# EAGLE board 8ChannelRebelSSR_v5 (EAGLE 9.6.2)
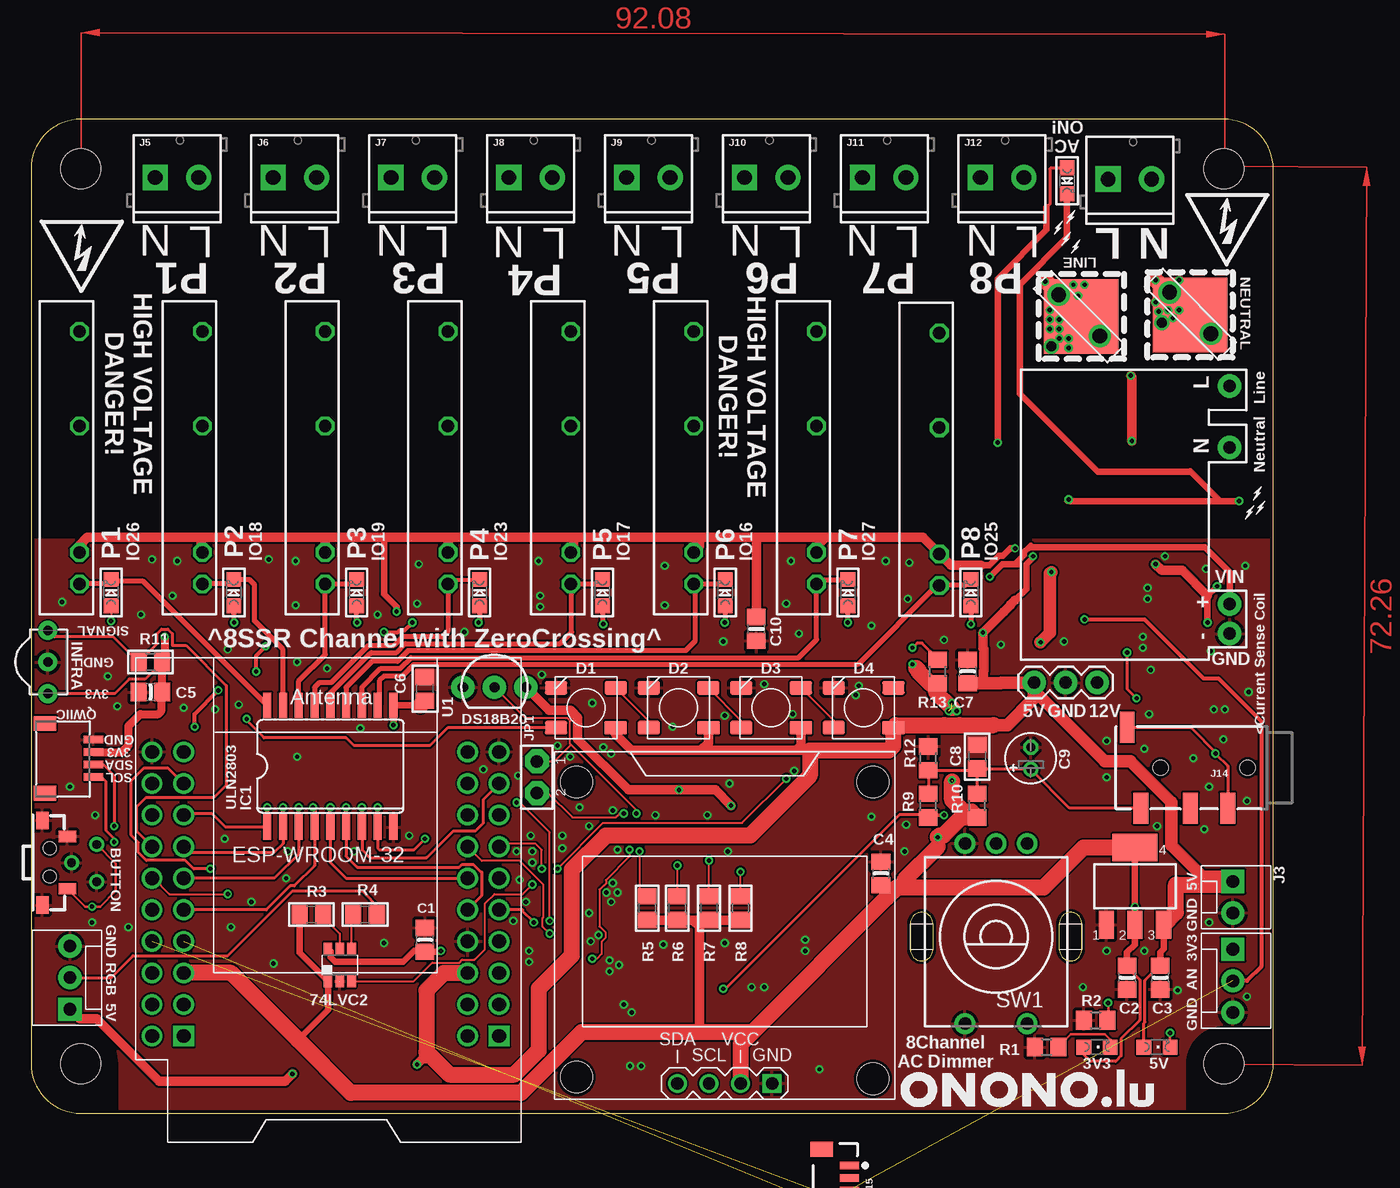
[diagram p0: board, top side]
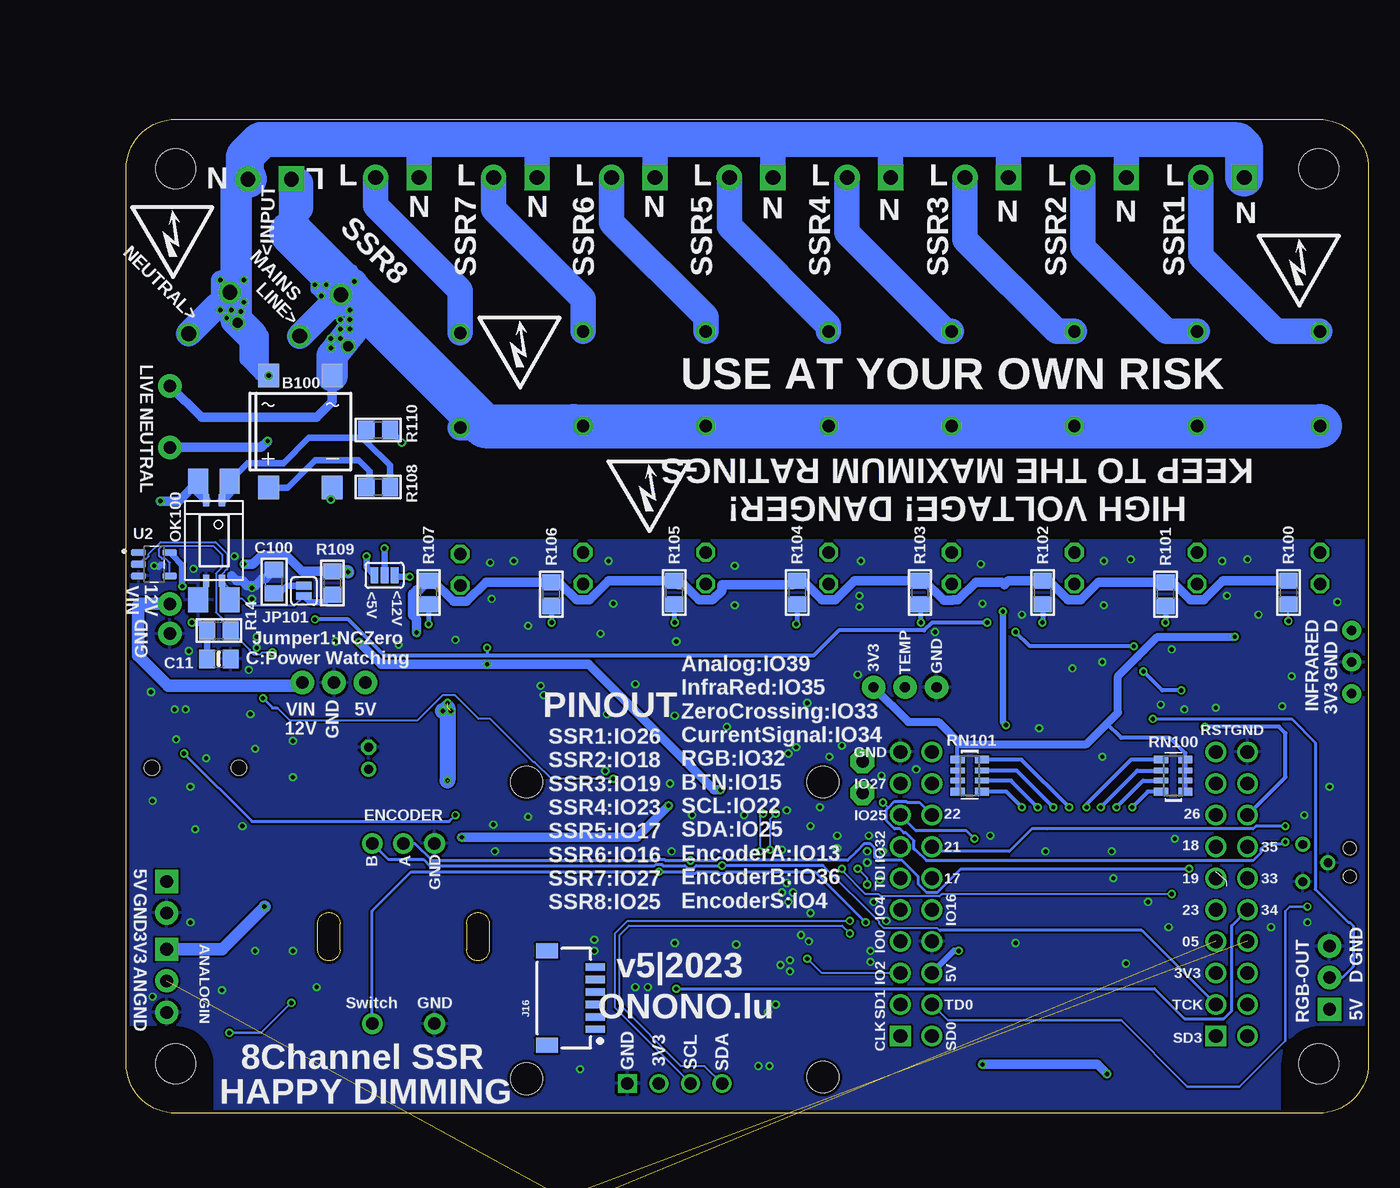
[diagram p1: board, bottom side, seen from below]

Size 100 x 80 mm. Coordinates in mm from the lower left corner, seen from the top.
Copper layers (1*16): Top 0.035mm / dielectric 1.5mm / Bottom 0.035mm
Design rules "dirt_cheap_dirty_boards.v1.1": minimum track width 6mil, minimum drill 12mil, track to track 6mil, track to pad 6mil, pad to pad 6mil, via to via 6mil, smd to smd 0mil, copper to edge 10mil, drill to drill 10mil, minimum pad ring 10mil, minimum via ring 6mil, stop-mask expansion 2mil, vias tented up to drill 25mil, thermal gap 10mil
Net classes: 3 12_mil: width 0.305 mm

## Footprints (pad centres in the part's own frame; a part is rotated, then mirrored left to right if it is on the bottom)
CHIPLED_0805 = smd 1.2 x 1.2: A 0,-1.05; C 0,1.05
DBV-R-PDSO-G6 = smd 0.69 x 0.99: 1 -0.95,-1.29; 2 0,-1.29; 3 0.95,-1.29; 4 0.95,1.3; 5 0,1.3; 6 -0.95,1.3
DBS = smd 1.7 x 1.9: + -2.55,-4.5; - 2.55,-4.5; AC1 -2.55,4.5; AC2 2.55,4.5
0805-NO = smd 1.3 x 1.5: 1 -0.95,0; 2 0.95,0
0805_NOTHERMALS@1 = smd 1.3 x 1.5: 1 -0.95,0; 2 0.95,0
E1,8-4 = drill 0.711 pad 1.168: + -0.889,0 | drill 0.711 pad 1.168 octagon: - 0.889,0
JST_SH4 = smd 0.6 x 1.55: 1 -1.5,2.514; 2 -0.5,2.514; 3 0.5,2.514; 4 1.5,2.514 | smd 1.2 x 1.8: MT1 -2.8,-1.386; MT2 2.8,-1.386
WS2812B = smd 1.8 x 1.1: 1 -2.4,1.6; 2 -2.4,-1.6; 3 2.4,-1.6; 4 2.4,1.6
SO-18L = smd 0.66 x 2.032: 1 -4.445,-4.902; 2 -3.175,-4.902; 3 -1.905,-4.902; 4 -0.635,-4.902; 5 0.635,-4.902; 6 1.905,-4.902; 7 3.175,-4.902; 8 4.445,-4.902; 9 5.715,-4.902; 10 5.715,4.902; 11 4.445,4.902; 12 3.175,4.902; 13 1.905,4.902; 14 0.635,4.902; 15 -0.635,4.902; 16 -1.905,4.902; 17 -3.175,4.902; 18 -4.445,4.902
TSOP382 = drill 0.762 pad 1.524: 1 -2.54,0; 2 0,0; 3 2.54,0
MOLEX-1X3 = drill 1.016 pad 1.88 square: 1 0,0 | drill 1.016 pad 1.88: 2 2.54,0; 3 5.08,0
MOLEX-1X2 = drill 1.016 pad 1.88 square: 1 0,0 | drill 1.016 pad 1.88: 2 2.54,0
1X03 = drill 1.016 pad 1.88: 1 0,0; 2 2.54,0; 3 5.08,0
SCREWTERMINAL-3.5MM-2 = drill 1.2 pad 2.032 square: 1 0,0 | drill 1.2 pad 2.032: 2 3.5,0
AUDIO_JACK_3.5MM_TRRS_SMD_RA = smd 1.2 x 2.5: EARTH 11.3,-3.25; RING1 6.2,3.25; RING2 3.2,3.25; TIP 10.2,3.25 | hole 1.2: 1.6,0; 8.6,0
JST-6-SMD-VERT-1.0MM = smd 0.6 x 1.55: 1 -2.54,1.27; 2 -1.54,1.27; 3 -0.54,1.27; 4 0.46,1.27; 5 1.46,1.27; 6 2.46,1.27 | smd 1.2 x 1.8: P$1 -3.84,-0.955; P$2 3.76,-0.955
JST-6-SMD-HORI-1.0MM = smd 0.6 x 1.55: 1 -2.5,-4.775; 2 -1.5,-4.775; 3 -0.5,-4.775; 4 0.5,-4.775; 5 1.5,-4.775; 6 2.5,-4.775 | smd 1.2 x 1.8: M1 -3.8,-0.9; M2 3.8,-0.9
JUMPER2 = drill 1 pad 1.93 octagon: 1 2.54,0; 2 0,0
SMT-JUMPER_3_2-NC_PASTE_SILK = smd 0.635 x 1.27: 1 -0.813,0; 2 0,0; 3 0.813,0
SMT-JUMPER_2_NO_SILK = smd 0.635 x 1.27: 1 -0.406,0; 2 0.406,0
AQG = drill 1 octagon: + -7.62,0; - -10.16,0; O1 2.54,0; O2 10.16,0
DIL4-SMD = smd 1.6 x 2: 1 -1.27,-4.77; 2 1.27,-4.77; 3 1.27,4.77; 4 -1.27,4.77
MINI-FLAT-4 = smd 1 x 0.5: 1 -3.24,0.635; 2 -3.24,-0.635; 3 3.24,-0.635; 4 3.24,0.635
DP10080_V1 = hole 3.2: -46,-36; 46,-36; 46,36; -46,36
R805 = smd 1.3 x 1.5: 1 -0.95,0; 2 0.95,0
0805@1 = smd 1.3 x 1.5: 1 -0.95,0; 2 0.95,0
RN8P-4R-CRA06S = smd 0.63 x 1.15: 1 -1.295,-0.975; 4 1.295,-0.975; 5 1.295,0.975; 8 -1.295,0.975 | smd 0.44 x 1.15: 2 -0.4,-0.975; 3 0.4,-0.975; 6 0.4,0.975; 7 -0.4,0.975
CI-11 = drill 1 pad 1.676: A -2.5,-7.5; B 0,-7.5; C 2.5,-7.5; D -2.5,7; E 2.5,7
TO-92-AMMO = drill 0.813 pad 1.88: 1 -2.54,0; 2 0,0; 3 2.54,0
SOT95P280X145-5N = smd 1.21 x 0.59: 1 -1.255,0.95; 2 -1.255,0; 3 -1.255,-0.95; 4 1.255,-0.95; 5 1.255,0.95
MH-ET_ESP32_D1_MINI = drill 1.11 pad 1.665: 3V3 25.4,-5.08; CMD 27.94,0; GND 0,-22.86; GND2 2.54,-7.62; GND3 27.94,-22.86; IO0 0,-7.62; IO2 0,-5.08; IO4 0,-10.16; IO5 25.4,-7.62; IO16 2.54,-10.16; IO17 2.54,-12.7; IO18 25.4,-15.24; IO19 25.4,-12.7; IO21 2.54,-15.24; IO22 2.54,-17.78; IO23 25.4,-10.16; IO25 0,-17.78; IO26 25.4,-17.78; IO27 0,-20.32; IO32 0,-15.24; IO33 27.94,-12.7; IO34 27.94,-10.16; IO35 27.94,-15.24; NC 27.94,-20.32; NC2 27.94,-5.08; RST 25.4,-22.86; RXD 2.54,-20.32; SD0 2.54,0; SD1 0,-2.54; SD2 27.94,-2.54; SVN 27.94,-17.78; SVP 25.4,-20.32; TCK 25.4,-2.54; TD0 2.54,-2.54; TDI 0,-12.7; TMS 27.94,-7.62; TXD 2.54,-22.86; VCC 2.54,-5.08 | drill 1.11 pad 1.665 square: CLK 0,0; SD3 25.4,0
DISPLAY-OLED-128X64-MAX-I2C = drill 1 square: 1 -3.81,12.7 | drill 1: 2 -1.27,12.7; 3 1.27,12.7; 4 3.81,12.7 | hole 2.54: -11.938,12.319; 11.938,12.192; 11.938,-11.557; -11.938,-11.557
SWITCH4.5X4.5 = drill 0.7: A 1.575,-0.749; B -1.422,-0.749; GND 0.102,1.27
1188 = smd 1.4 x 1: P$1 -3.39,-0.07; P$2 3.44,-0.06 | smd 0.9 x 1.4: P$3 2.11,1.95; P$4 -2.09,1.95 | hole 1: -1.14,0.52; 1.14,0.52
SOT223 = smd 1.219 x 2.235: 1 -2.311,-3.099; 2 0,-3.099; 3 2.311,-3.099 | smd 3.6 x 2.2: 4 0,3.099
ACDC-5V = drill 1 pad 1.9: P$1 2.413,1.27; P$2 4.8,1.27; P$3 17.399,1.27; P$4 22.352,1.27
EST026-COLDPRESSTERMINAL = drill 1.2: P$1 0,2.286; P$2 0,-2.413
SCREWTERMINALFLAT5X5 = smd 6 x 6: P$1 0,0
WT32-ETH01-DIM = drill 0.8: 3V3 -11.557,33.528; 3V31 -11.557,15.748; 5V -11.557,10.668; 485 -11.557,25.908; CFG -11.557,28.448; EN -11.557,38.608; EN1 -11.557,30.988; GND -11.557,36.068; GND1 -11.557,18.288; GND2 -11.557,13.208; GND3 11.303,8.128; GND4 11.303,30.988; IO0 11.303,33.528; IO2 11.303,10.668; IO4 11.303,13.208; IO12 11.303,18.288; IO14 11.303,20.828; IO15 11.303,23.368; IO35 11.303,15.748; IO36 11.303,25.908; IO39 11.303,28.448; LINK -11.557,8.128; RX -11.557,23.368; RX0 11.303,36.068; TX -11.557,20.828; TX0 11.303,38.608

## Placement (x,y rotation side)
3V3  [CHIPLED_0805]  85.81,5.33 270 top
5V  [CHIPLED_0805]  90.64,5.33 270 top
74LVC2  IC_BUFF_SN74LVC1T45DBV  [DBV-R-PDSO-G6]  24.85,11.93 0 top
ACOK!  [CHIPLED_0805]  83.4,75.05 180 top
B100  DBS107G  [DBS]  85.97,54.86 0 bottom
C1  4,7uF  [0805-NO]  31.71,13.96 270 top
C2  10uf  [0805-NO]  88.23,10.92 90 top
C3  10uF  [0805-NO]  90.89,10.92 90 top
C4  10uF  [0805-NO]  68.41,19.3 270 top
C5  0,1uf  [0805-NO]  9.61,33.9 0 top
C6  10uf  [0805_NOTHERMALS@1]  31.71,34.16 90 top
C7  10uF  [0805-NO]  75.4,35.55 270 top
C8  10uf  [0805_NOTHERMALS@1]  76.16,28.7 90 top
C9  [E1,8-4]  80.48,28.57 90 top
C10  1uf  [0805-NO]  58.38,38.98 90 top
C11  10uf  [0805-NO]  92.55,36.57 180 bottom
C100  2,2uf  [0805_NOTHERMALS@1]  88.1,42.79 90 bottom
CONN1  STEMMA_I2C_QT  [JST_SH4]  2.5,28.57 270 top
D1  WS2812B  [WS2812B]  44.67,32.63 180 top
D2  WS2812B  [WS2812B]  52.12,32.63 180 top
D3  WS2812B  [WS2812B]  59.57,32.63 180 top
D4  WS2812B  [WS2812B]  67.02,32.63 180 top
IC1  [SO-18L]  23.46,27.93 0 top
INFRA  38kHz  [TSOP382]  1.36,36.32 270 top
J1  [MOLEX-1X3]  3.14,8.38 90 top
J2  [MOLEX-1X3]  96.74,13.2 270 top
J3  [MOLEX-1X2]  96.74,18.66 270 top
J4  455-1750-1-ND  [1X03]  85.81,34.67 180 top
J5  [SCREWTERMINAL-3.5MM-2]  9.99,75.31 0 top
J6  [SCREWTERMINAL-3.5MM-2]  19.48,75.31 0 top
J7  [SCREWTERMINAL-3.5MM-2]  28.97,75.31 0 top
J8  [SCREWTERMINAL-3.5MM-2]  38.46,75.31 0 top
J9  [SCREWTERMINAL-3.5MM-2]  47.95,75.31 0 top
J10  [SCREWTERMINAL-3.5MM-2]  57.44,75.31 0 top
J11  [SCREWTERMINAL-3.5MM-2]  66.93,75.31 0 top
J12  [SCREWTERMINAL-3.5MM-2]  76.42,75.31 0 top
J13  [SCREWTERMINAL-3.5MM-2]  86.7,75.18 0 top
J14  AUDIO_JACK_TRRSSMD_RA  [AUDIO_JACK_3.5MM_TRRS_SMD_RA]  99.53,27.81 180 top
J15  JST_6_PIN_VERTICAL  [JST-6-SMD-VERT-1.0MM]  64.6,-6.74 270 top
J16  BM06B-SRSS-TB  [JST-6-SMD-HORI-1.0MM]  67.02,9.27 90 bottom
JP1  [JUMPER2]  40.73,25.78 90 top
JP100  JUMPER-SMT_3_2-NC_PASTE_SILK  [SMT-JUMPER_3_2-NC_PASTE_SILK]  79.21,43.3 180 bottom
JP101  JUMPER-SMT_2_NO_SILK  [SMT-JUMPER_2_NO_SILK]  85.69,42.03 90 bottom
K1  AQG12105  [AQG]  3.9,52.76 90 top
K2  AQG12105  [AQG]  13.79,52.76 90 top
K3  AQG12105  [AQG]  23.67,52.76 90 top
K4  AQG12105  [AQG]  33.56,52.76 90 top
K5  AQG12105  [AQG]  43.45,52.76 90 top
K6  AQG12105  [AQG]  53.34,52.76 90 top
K7  AQG12105  [AQG]  63.23,52.76 90 top
K8  AQG12105  [AQG]  73.11,52.64 90 top
OK100  LTV816S  [DIL4-SMD]  92.93,46.1 180 bottom
OK101  TLP283  [MINI-FLAT-4]  92.93,46.1 270 bottom
P1  [CHIPLED_0805]  6.44,41.91 0 top
P2  [CHIPLED_0805]  16.33,41.91 0 top
P3  [CHIPLED_0805]  26.21,41.91 0 top
P4  [CHIPLED_0805]  36.1,41.91 0 top
P5  [CHIPLED_0805]  45.99,41.91 0 top
P6  [CHIPLED_0805]  55.88,41.91 0 top
P7  [CHIPLED_0805]  65.77,41.91 0 top
P8  [CHIPLED_0805]  75.65,41.91 0 top
PCB1  PCB_DP_RECTANGLE-80X100  [DP10080_V1]  50,40 0 top
R1  1k  [R805]  81.75,5.33 0 top
R2  2,2k  [R805]  85.69,7.49 0 top
R3  10k  [0805@1]  22.57,16 180 top
R4  200  [0805@1]  26.89,16 0 top
R5  proto 5.1k  [0805@1]  49.62,16.5 270 top
R6  proto 10k  [0805@1]  52.03,16.5 90 top
R7  proto 10k  [0805@1]  54.57,16.5 90 top
R8  proto 10k  [0805@1]  57.11,16.5 90 top
R9  33Ohm  [R805]  72.22,24.76 90 top
R10  10k  [R805]  76.16,24.76 90 top
R11  10k  [0805@1]  9.61,36.32 0 top
R12  10k  [R805]  72.22,28.57 90 top
R13  [R805]  72.99,35.55 90 top
R14  proto 68k  [0805@1]  92.55,38.86 180 bottom
R100  10k proto 51k  [0805@1]  6.44,41.91 90 bottom
R101  10k proto 51k  [0805@1]  16.33,41.78 90 bottom
R102  10k proto 51k  [0805@1]  26.21,41.91 90 bottom
R103  10k proto 51k  [0805@1]  36.1,41.91 90 bottom
R104  10k proto 51k  [0805@1]  45.99,41.91 90 bottom
R105  10k proto 51k  [0805@1]  55.88,41.91 90 bottom
R106  proto 2k  [0805@1]  65.77,41.78 90 bottom
R107  proto 2k  [0805@1]  75.65,41.91 90 bottom
R108  390k proto 120k proto 330k 430k  [0805@1]  79.72,50.41 0 bottom
R109  10k  [0805@1]  83.4,42.67 90 bottom
R110  proto 68k  [0805@1]  79.72,54.99 180 bottom
RN100  [RN8P-4R-CRA06S]  15.71,27.17 90 bottom
RN101  [RN8P-4R-CRA06S]  32.09,27.17 270 bottom
SW1  CI-11  [CI-11]  77.69,14.22 180 top
U1  DS18B20  [TO-92-AMMO]  37.3,34.28 0 top
U2  SN74LVC1G17DBVR  [SOT95P280X145-5N]  97.75,44.19 0 bottom
U$1  MH-ET_ESP32_D1_MINI  [MH-ET_ESP32_D1_MINI]  37.68,6.22 180 top
U$2  DISPLAY-OLED-128X64-I2CEXTHOLES  [DISPLAY-OLED-128X64-MAX-I2C]  55.84,15.11 180 top
U$3  [LOGOONONOLU_3MM_TOP]  69.94,0.5 0 top
U$4  SWITCH4.5-4,5  [SWITCH4.5X4.5]  4.53,20.06 90 top
U$5  1188  [1188]  0.98,20.19 270 top
U$6  AP11173V3  [SOT223]  88.86,18.28 0 top
U$7  ACDC-SUPPLY  [ACDC-5V]  97.75,36.19 90 top
U$8  [SPARKLOGO]  98.13,48.38 0 top
U$9  [SPARKLOGO]  99.02,48.76 0 top
U$10  [SPARKLOGO]  98.77,49.91 0 top
U$11  [SPARKLOGO]  82.64,71.24 180 top
U$12  [SPARKLOGO]  83.27,70.35 180 top
U$13  [SPARKLOGO]  83.66,72.13 180 top
U$14  [SPARKLOGO]  84.04,69.72 180 top
U$15  EST026_COLDPRESSTERMINAL  [EST026-COLDPRESSTERMINAL]  84.33,64.26 45 top
U$16  SCREWTERMINAL_BLOCL5X5_FLAT  [SCREWTERMINALFLAT5X5]  84.54,64.13 0 top
U$17  EST026_COLDPRESSTERMINAL  [EST026-COLDPRESSTERMINAL]  93.27,64.44 45 top
U$18  SCREWTERMINAL_BLOCL5X5_FLAT  [SCREWTERMINALFLAT5X5]  93.31,64.26 0 top
U$19  W32-ETH01  [WT32-ETH01-DIM]  -24.93,-0.64 0 top  (outside the outline)

## Library data of the parts
3V3 5V = adafruit
74LVC2 IC1 R1 R2 R9 R10 R12 R13 RN100 RN101 = dp_devices
ACOK! C1-C8 C10 C11 C100 CONN1 JP1 P1-P8 R3-R8 R11 R14 R100-R110 = microbuilder
B100 = rectifier
C9 = rcl; SPICEPREFIX: C
D1-D4 = we-opto
INFRA = SparkFun-Sensors; PROD_ID: SEN-14114
J1 J2 = SparkFun-Connectors; PROD_ID: CONN-08625; SF_ID: PRT-08096
J3 = SparkFun-Connectors; SF_ID: PRT-09918
J4 J16 = SparkFun-Connectors; PROD_ID: XXX-00000
J5-J13 = SparkFun-Connectors; PROD_ID: CONN-08399
J14 = SparkFun-Connectors; PROD_ID: CONN-10676; SF_ID: PRT-12639
J15 = SparkFun-Connectors; PROD_ID: CONN-08249; SF_ID: GPS-00579
JP100 JP101 = SparkFun-Jumpers
K1-K8 = relay; MF: AROMAT/ MATSUSHITA; MPN: AQG12105; OC_FARNELL: unknown; OC_NEWARK: 20J4759
OK100 = optocoupler
OK101 = optocoupler; OC_FARNELL: unknown; OC_NEWARK: unknown
PCB1 = dp_devices; PCB_SIZE: DP10080_V1
SW1 = piher; OC_FARNELL: unknown; OC_NEWARK: unknown
U1 = SparkFun-Sensors; STORE_ID: SEN-00245
U2 = SN74LVC1G17DBVR; AVAILABILITY: In Stock; DESCRIPTION: Single 1.65-V to 5.5-V buffer with Schmitt-Trigger inputs; MF: Texas Instruments; MP: SN74LVC1G17DBVR; PACKAGE: SOT-23-5 Texas Instruments; PRICE: None; PURCHASE-URL: https://pricing.snapeda.com/search?q=SN74LVC1G17DBVR&ref=eda
U$1 = MH-ET_ESP32_D1_MINI
U$2 = diy-modules
U$3 U$4 U$7 U$15-U$19 = MyBreadBoards
U$5 = SwitchMax
U$6 = gee_s
U$8-U$14 = pimoroni

## Nets
3V3: 3V3.A 74LVC2.1 C2.2 C4.2 C5.2 C11.2 CONN1.2 INFRA.3 J2.1 R3.2 R5.2 R6.1 R7.1 R8.1 R10.1 R11.2 R13.1 R14.2 R109.2 RN100.1 RN100.2 RN100.3 RN100.4 RN101.1 RN101.2 RN101.3 RN101.4 U1.3 U2.5 U$1.3V3 U$2.2 U$6.2 U$6.4
5V: 5V.A 74LVC2.6 C1.2 C3.2 C7.2 D1.1 D2.1 D3.1 D4.1 J1.1 J3.1 J4.3 JP100.3 R100.2 R101.2 R102.2 R103.2 R104.2 R105.2 R106.2 R107.2 U$1.VCC U$6.3
12V: J4.1 JP100.1 U$7.P$2
+: OK100.1 OK101.1 R108.2 R110.2
-: ACOK!.C B100.- OK100.2 OK101.2
BTN: U$1.TD0 U$4.A U$5.P$3
CURRENT-: C8.1 C9.+ J14.TIP R9.2 R10.2 R12.1
CURRENTSIGNAL: J14.EARTH J14.RING2 R9.1 U$1.IO34
DIODE+: B100.+ R108.1
DMX-RTS: J15.5 U$1.IO5
DMX-RX: U$1.IO0
DMX-TX: J15.4 U$1.TMS
ENCODERA: R6.2 SW1.A U$1.TCK
ENCODERB: R7.2 SW1.B U$1.SVP
ENCODERS: R8.2 SW1.D U$1.IO4
GND: 74LVC2.2 C1.1 C2.1 C3.1 C4.1 C5.1 C6.2 C7.1 C8.2 C9.- C10.1 C11.1 C100.2 CONN1.1 D1.3 D2.3 D3.3 D4.3 IC1.9 INFRA.2 J1.3 J2.3 J3.2 J4.2 OK100.3 OK101.3 R1.1 R2.1 R12.2 SW1.C SW1.E U1.1 U2.3 U$1.GND U$1.GND2 U$1.GND3 U$2.1 U$4.B U$4.GND U$5.P$1 U$5.P$2 U$5.P$4 U$6.1 U$7.P$1
INFRASIGNAL: INFRA.1 R11.1 U$1.IO35
LINE: B100.AC2 J13.1 K1.O1 K2.O1 K3.O1 K4.O1 K5.O1 K6.O1 K7.O1 K8.O1 U$7.P$4 U$15.P$1 U$15.P$2 U$16.P$1
N$1: C100.1 JP101.2
N$2: J15.1
N$3: 74LVC2.5 R3.1
N$4: 74LVC2.4 R4.1
N$5: D1.2 D2.4
N$6: D2.2 D3.4
N$7: D3.2 D4.4
N$8: ACOK!.A R110.1
N$9: 3V3.C R1.2
N$10: 5V.C R2.2
N$11: J15.2
N$13: P4.A R103.1
N$14: P3.A R102.1
N$16: P2.A R101.1
N$17: P1.A R100.1
N$18: P8.A R107.1
N$19: P7.A R106.1
N$20: P6.A R105.1
N$21: P5.A R104.1
N$23: J15.6
NC1: J14.RING1
NEUTRAL: B100.AC1 J5.1 J6.1 J7.1 J8.1 J9.1 J10.1 J11.1 J12.1 J13.2 U$7.P$3 U$17.P$1 U$17.P$2 U$18.P$1
POTI-DMXRX: J2.2 J15.3 R13.2 U$1.SVN
RGB3V3: 74LVC2.3 U$1.IO32
RGB5V: D1.4 J1.2 R4.2
SCL: CONN1.4 U$1.IO22 U$2.3
SDA: CONN1.3 U$1.IO21 U$2.4
SSR1: IC1.18 K1.- P1.C
SSR1-3V3: IC1.1 RN100.8 U$1.IO26
SSR2: IC1.17 K2.- P2.C
SSR2-3V3: IC1.2 RN100.7 U$1.IO18
SSR3: IC1.16 K3.- P3.C
SSR3-3V3: IC1.3 RN100.6 U$1.IO19
SSR4: IC1.15 K4.- P4.C
SSR4-3V3: IC1.4 RN100.5 U$1.IO23
SSR5: IC1.14 K5.- P5.C
SSR5-3V3: IC1.5 RN101.8 U$1.IO17
SSR6: IC1.13 K6.- P6.C
SSR6-3V3: IC1.6 RN101.7 U$1.IO16
SSR7: IC1.12 K7.- P7.C
SSR7-3V3: IC1.7 RN101.6 U$1.IO27
SSR8: IC1.11 K8.- P8.C
SSR8-3V3: IC1.8 RN101.5 U$1.IO25
SSROUT-1: J5.2 K1.O2
SSROUT-2: J6.2 K2.O2
SSROUT-3: J7.2 K3.O2
SSROUT-4: J8.2 K4.O2
SSROUT-5: J9.2 K5.O2
SSROUT-6: J10.2 K6.O2
SSROUT-7: J11.2 K7.O2
SSROUT-8: J12.2 K8.O2
TEMP: JP1.2 U$1.IO2
TEMP-JP: JP1.1 R5.1 U1.2
VSSR: C6.1 C10.2 IC1.10 JP100.2 K1.+ K2.+ K3.+ K4.+ K5.+ K6.+ K7.+ K8.+
ZEROSIGNAL: R14.1 U2.4 U$1.IO33
ZEROSIGNALRAW: JP101.1 OK100.4 OK101.4 R109.1 U2.2

## Tracks (layer width: path | path; a pad name or v marks a point on that pad's centre or on a via)
3V3  (via drill 0.35)  (3 unrouted)
  Top 0.203: 68.86,17.33 68.41,17.77 C4.2
  Top 0.254: 5.55,33.78 INFRA.3 6.74,33.78 7.9,34.93 9.18,34.93 R11.2 | C2.2 88.23,11.76 89.26,10.73 89.26,7.5 87.74,5.99 87.74,4.61 87.32,4.19 85.31,4.19 84.76,4.73 3V3.A | R13.1 72.86,34.6 72.49,34.6 71.25,35.85 v70.95,36.14
  Top 0.305: 75.78,23.81 R10.1
  Top 0.356: 7.84,31.18 7.93,31.27 | 10.47,33.81 C5.2 | 7.84,29.59 7.84,29.84 | 7.32,29.07 7.45,29.2
  Top 0.508: C2.2 88.23,12.95 88.86,13.58 U$6.2 v88.86,16.63 U$6.4 | R3.2 21.62,12.93 74LVC2.1 23.9,8.32 21.49,5.9 | v94.7,39.49 94.7,41.64 v95.48,42.41
  Top 0.66: v10.76,38.35 10.76,36.51 R11.2 C5.2 | CONN1.2 7.32,29.07 | 7.84,29.59 7.45,29.2 | 7.84,31.18 7.84,29.84 | 7.93,31.27 8.79,32.13 10.25,32.13 10.47,32.35 10.47,33.81
  Top 0.762: v72.99,22.22 72.99,21.46 68.86,17.33 | 57.11,5.58 57.3,5.77 | R5.2 R6.1 53.3,15.55 | 53.3,15.55 R7.1 R8.1 | 53.81,6.53 53.81,15.05 53.3,15.55 | v56.35,24.76 55.08,26.03 v52.16,26.03 48.09,26.03 44,30.12 44,31.83 43.42,32.42 41.7,32.42 U1.3 | v90.51,44.19 91.02,43.68 92.66,43.68 94.7,41.64
  Top 1.016: v81.26,37.9 82.02,38.66 82.02,43.44 v82.13,43.56
  Top 1.27: U$6.4 84.72,21.38 81.5,18.16 70.32,18.16 | 58.06,6.53 68.86,17.33 69.69,18.16 70.32,18.16 | 58.06,6.53 57.3,5.77 | 57.11,5.58 U$2.2 | 58.06,6.53 53.81,6.53 44.33,6.53 39.44,1.65 25.74,1.65 21.49,5.9 16.09,11.3 U$1.3V3 | 70.32,18.16 70.32,18.79 72.99,21.46 | 75.78,23.81 74.88,23.81 73.45,22.37 73.14,22.37 v72.99,22.22 | R10.1 75.7,24.27 75.09,24.27 74.13,25.23 74.13,26.71 | 74.13,32.63 72.86,33.9 72.86,34.6 | R13.1 72.49,34.6 72.37,34.6 71.45,35.53 71.45,35.64 71.25,35.85
  Bottom 0.152: 14.73,26.66 RN100.2 | 96.33,44.98 U2.5
  Bottom 0.305: 21.04,31.36 19.9,30.22 15.98,30.22 14.73,28.98 RN100.4 RN100.3 RN100.2 | RN101.4 RN101.3 RN101.2 RN101.1 33.07,29.5 32.85,29.71 | 14.73,26.66 RN100.1
  Bottom 0.508: v95.48,42.41 95.48,44.12 96.33,44.98 | C11.2 R14.2 94.13,39.49 v94.7,39.49
  Bottom 0.66: U1.3 37.05,31.49 34.63,31.49 32.85,29.71 22.69,29.71 21.04,31.36 20.15,32.25 20.15,35.17 18.55,36.78 18.07,37.25 16.98,38.35 v10.76,38.35
  Bottom 0.762: v56.35,24.76 58.89,22.22 v72.99,22.22 | v52.16,26.03 52.67,26.03 62.78,36.14 v70.95,36.14 79.49,36.14 v81.26,37.9 | R109.2 85.82,43.62 87.13,44.93 89.07,44.93 89.81,44.19 v90.51,44.19
  Bottom 1.016: J2.1 92.29,13.2 v88.86,16.63 | v82.13,43.56 82.19,43.62 R109.2
  Bottom 1.27: v74.13,26.79 74.13,32.63 74.38,32.38 v74.51,32.38
  other vias: 73.88,32.38 74.13,33.02
5V  (via drill 0.35)
  Top 0.254: 5V.A 89.59,7.26 89.66,7.33 89.66,10.7 90.83,11.87 C3.2
  Top 0.508: C3.2 90.89,12.95 91.17,13.23 U$6.3 | 74LVC2.6 24.1,13.03 24.1,12.57 24.48,12.19 29.93,12.19 30.82,13.08 31.65,13.08 C1.2 32.92,13.01 v32.98,13.08 | 79.21,41.27 80.12,42.18 80.12,44.17 80.58,44.63 80.58,44.75 v80.65,44.83
  Top 0.762: J1.1 3.9,7.61 5.27,7.61 10.32,2.57 20.44,2.57 v21.04,3.17 | v31.08,3.93 31.52,4.38 32.41,4.38 | D1.1 47.07,30.49 48.35,29.2 53.94,29.2 | D2.1 54.52,29.78 53.94,29.2 | 53.94,29.2 61.56,29.2 | D3.1 61.97,29.61 61.56,29.2 | 61.56,29.2 62.7,29.2 | 76.67,34.6 76.67,35.62 76.68,35.63 76.68,37.38 76.62,37.44 v76.62,38.68 78.3,40.36 78.32,40.36 78.85,40.89 78.85,40.91 79.21,41.27
  Top 1.016: C7.2 76.67,34.6 78.03,34.6 78.09,34.67 J4.3 | 77.49,31.24 78.58,31.24 80.73,33.4 J4.3 | J4.3 80.73,34.03 86.45,28.32 88.5,28.32 91.78,25.03 91.78,21.58 94.32,19.04 96.23,19.04 96.48,18.79 96.48,18.41
  Top 1.27: U$6.3 92.16,16.17 92.16,18.41 96.48,18.41 J3.1 | U$1.VCC 34.86,11.3 34.84,11.27 33.21,11.27 31.84,9.9 31.84,4.95 32.41,4.38 33.68,3.11 38.89,3.11 40.86,5.07 40.86,10.03 43.52,12.69 43.52,19.6 46.27,22.35 57.87,22.35 62.7,27.17 62.7,29.2 69.05,29.2 69.42,29.57 D4.1 69.62,31.24 73.52,31.24 73.54,31.21 74.72,31.21 74.74,31.24 77.49,31.24
  Bottom 0.356: 29.3,42.54 29.49,42.73
  Bottom 0.406: 16.2,42.73 R101.2 | R103.2 35.78,42.85
  Bottom 0.508: v32.98,13.08 33.36,13.08 U$1.VCC | JP100.3 80.65,43.93 v80.65,44.83
  Bottom 0.762: v21.04,3.17 21.81,3.93 v31.08,3.93 | R100.2 11.71,42.85 13.25,41.32 14.32,41.32 15.73,42.73 16.2,42.73 | R101.2 21.73,42.73 23.14,41.32 24.21,41.32 25.62,42.73 26.09,42.73 R102.2 28.98,42.85 29.3,42.54 | 29.49,42.73 31.61,42.73 33.03,41.32 33.44,41.32 33.49,41.27 34.19,41.27 35.78,42.85 | R103.2 41.38,42.85 42.92,41.32 43.98,41.32 45.52,42.85 R104.2 46.3,42.54 52.05,42.54 52.05,42.07 52.8,41.32 53.87,41.32 55.09,42.54 55.56,42.54 R105.2 61.15,42.85 62.69,41.32 63.76,41.32 65.11,42.67 65.7,42.67 R106.2 71.04,42.73 72.58,41.19 73.66,41.19 75.32,42.85 R107.2 76.37,42.14 76.62,42.14 76.94,41.83 76.94,40.08 76.62,39.77 v76.62,38.68
12V  (via drill 0.35)
  Top 0.508: v77.18,43.17 78.19,44.19 79.21,44.19 | 79.21,44.19 79.46,44.19 | 79.21,44.19 79.92,44.9 79.92,45.13 80.35,45.56 | 80.35,45.56 80.48,45.69 | 80.35,45.56 94.48,45.56 96.48,43.56 U$7.P$2
  Bottom 0.508: JP100.1 78.27,43.17 v77.18,43.17
  Bottom 1.016: J4.1 86.07,34.41 96.61,34.41 99.02,36.82 99.02,40.89 98.92,40.99 U$7.P$2
+
  Bottom 0.508: R108.2 78.77,52.13 80.67,54.03 80.67,54.6 | 80.67,54.6 R110.2 | OK100.1 90.2,52.32 87.34,52.32 85.31,54.35 80.92,54.35 80.67,54.6
  Bottom 0.762: OK101.1 91.66,49.97 OK100.1
-  (via drill 0.35)
  Top 0.508: 83.44,49.3 v83.53,49.4 83.66,49.27 v97.24,49.27 95.72,49.27 93.37,51.62 | 93.37,51.62 93.31,51.68 | 93.37,51.62 85.88,51.62 79.59,57.91 79.59,66.67 83.4,70.48 ACOK!.C
  Bottom 0.508: B100.- 83.42,49.5 v83.53,49.4
  Bottom 0.762: v97.24,49.27 95.79,49.27 OK100.2 94.2,49.97 OK101.2
BTN  (via drill 0.35)
  Top 0.203: U$5.P$3 4.37,16.63 v4.91,16.63 5.55,16.63 6.82,17.9 6.82,20.1 U$4.A
  Bottom 0.203: U$1.TD0 33.87,7.49 19.9,7.49 14.57,2.15 10.38,2.15 6.69,5.84 6.69,16.25 6.31,16.63 v4.91,16.63
CURRENT-
  Top 0.254: R9.2 R12.1 76.03,27.62 | 76.03,27.62 76.16,27.62 R10.2 | 76.03,27.62 C8.1 80.41,27.75 C9.+ 83.6,24.56 J14.TIP
CURRENTSIGNAL  (via drill 0.35)
  Top 0.152: 96.33,24.63 J14.RING2
  Top 0.254: v55.71,10.03 55.9,10.03 69.94,24.06 71.97,24.06 72.13,23.9 72.22,24 v73.49,24 72.41,24 R9.1 | J14.EARTH 93.36,31.06 95.47,28.95 v95.34,28.95 96.33,27.96 96.33,24.63
  Bottom 0.254: U$1.IO34 11.01,15.11 11.01,8.25 11.65,7.61 14.82,7.61 17.23,10.03 v55.71,10.03 | v95.34,28.95 89.88,23.49 74,23.49 v73.49,24
DIODE+
  Bottom 0.508: R108.1 80.41,50.67 80.41,51.68 81.3,52.57 84.8,52.57 87.01,50.36 B100.+
DMX-RTS  (1 unrouted)
DMX-TX  (1 unrouted)
ENCODERA  (via drill 0.35)
  Top 0.152: R6.2 v52.03,19.94
  Bottom 0.152: 34.46,14.73 34.53,14.73 34.7,14.9 38.52,14.9 39.02,14.9 39.38,15.26 39.38,15.41 43.91,19.94
  Bottom 0.254: SW1.A 78.91,20.44 76.06,20.44 75.56,19.94 57.46,19.94 57.36,20.03 56.86,20.03 56.77,19.94 55.02,19.94 54.82,19.74 54.32,19.74 54.12,19.94 v52.03,19.94 43.91,19.94 | U$1.TCK 18.25,14.73 34.46,14.73
ENCODERB  (via drill 0.35)
  Top 0.152: R7.2 v54.57,20.35
  Top 0.254: v14.44,19.68 13.09,19.68 12.42,20.35 9.28,20.35 8.63,21 8.63,21.81 8.06,22.37 8.06,26.77 9.11,27.81 11.01,27.81 U$1.SVP
  Bottom 0.254: SW1.B 76.77,21.72 75.39,20.35 57.62,20.35 57.53,20.44 56.69,20.44 56.6,20.35 v54.57,20.35 52.48,20.35 52.28,20.55 51.78,20.55 51.58,20.35 41.94,20.35 41.22,21.06 40.6,21.68 40.1,21.68 39.74,21.33 39.74,20.6 39.46,20.31 39.43,20.35 37.54,20.35 36.25,19.06 36.25,18.46 35.6,17.81 34.68,17.81 32.81,19.68 v14.44,19.68
ENCODERS  (via drill 0.35)
  Top 0.152: R8.2 v57.11,19.43
  Top 0.254: v40.47,15.36 39.59,16.25 39.59,16.38 U$1.IO4
  Bottom 0.254: SW1.D 80.19,16.29 77.05,19.43 v57.11,19.43 55.08,19.43 54.99,19.33 54.15,19.33 54.06,19.43 52.38,19.43 52.28,19.33 51.78,19.33 51.69,19.43 44.54,19.43 v40.47,15.36
GND  (via drill 0.35)
  Bottom 0.508: 97.37,43.99 97.23,44.13 97.12,44.13
  Bottom 0.762: 91.51,43.25 91.12,42.86 90.63,42.86 90.25,42.47 89.62,42.47 89.07,43.03 88.82,43.03 C100.2
  other vias: 39.33,18.79 40.22,22.35 46.32,17.77 47.21,17.77 46.7,17.01 46.82,18.54 45.05,13.84 45.68,14.35 46.57,11.42 46.57,12.31 47.33,11.93 40.09,12.19 40.09,13.08 28.41,13.71 39.84,17.01 40.35,21.08 40.35,20.19 38.82,15.49 39.08,21.08 19.52,12.06 20.54,18.92 17.74,17.01 16.09,14.98 7.84,14.98 4.91,15.36 5.17,24 3.14,26.28 6.95,32.76 6.18,35.17 12.28,32.63 14.82,32.51 16.73,32.89 15.84,37.33 11.77,44.45 8.85,40.13 2.5,41.14 9.74,44.57 19.14,44.57 21.42,36.32 23.84,35.81 21.42,28.7 26.5,30.98 30.44,22.35 36.41,27.68 34.89,38.73 40.98,40.76 40.98,41.65 40.86,44.45 45.17,33.02 41.11,35.3 39.2,27.17 56.1,21.08 55.84,13.71 50.89,13.58 48.35,8.12 47.71,8.76 49.11,3.8 48.22,3.8 63.46,3.55 62.32,13.08 62.32,13.96 70.32,21.08 67.65,23.87 70.45,23.24 66.64,34.41 59.02,34.54 51.65,31.11 55.71,37.97 61.81,38.6 61.18,44.45 67.65,39.24 68.8,44.45 73.49,38.09 78.07,37.71 83.15,37.97 89.88,41.4 89.88,42.29 89.5,37.46 97.75,44.06 98.01,33.9 96.1,32.51 95.21,32.51 89.5,38.35 89.62,29.33 86.58,27.05 97.88,25.14 94.83,26.28 97.88,9.39 94.83,15.36 89.62,13.08 86.58,13.08 84.67,10.15 92.29,9.9 58,10.15 59.02,10.15 46.82,24.38 56.22,26.54 61.43,27.55 31.2,44.19 31.08,41.02 27.9,40.13 21.3,40.89 21.3,44.45 11.39,41.65 51.02,40.89 51.02,44.06 60.79,41.02 70.57,41.4 70.7,44.32 15.58,22.09 20.66,21.08 26,21.08 93.56,28.57 95.97,30.09 90.64,23.11 94.45,22.85 86.58,29.97 90,32.13 94.58,43.81 94.96,37.21 90.13,35.68 91.27,44.83 44.92,16.12 47.21,21.2 42.76,21.33 42.76,22.35 44.16,24.63 46.7,28.95 46.06,29.46 42.38,29.59 43.4,28.7 50.25,24 54.45,24 55.84,32 61.3,32.13 66.38,33.65 44.92,23.11
  pour Bottom: -2.97,46.1 -3.34,-2.16 105.5,-2.16 105.87,46.1
  pour Top: -2.95,46.1 -2.69,-2.67 105.5,-2.67 105.5,46.1
INFRASIGNAL
  Top 0.254: U$1.IO35 8.47,22.73 8.47,24.63 9.23,25.39 14.69,25.39 15.71,26.41 15.71,34.41 12.47,37.65 11.37,37.65 11.37,38.6 11.01,38.96 10.5,38.96 10.15,38.6 10.15,37.8 R11.1 6.63,38.35 1.87,38.35 INFRA.1
LINE  (via drill 0.35, 0.8)
  Top 0.508: U$16.P$1 v82.77,62.35 | U$16.P$1 83.53,63.11 v82,63.11 | U$16.P$1 85.69,62.99 85.69,62.48 84.54,63.62 U$16.P$1 | U$16.P$1 85.56,64.13
  Top 1.27: v81.62,66.92 81.75,66.92 U$16.P$1 82.8,65.87 U$15.P$1
  Bottom 0.254: 73.05,55.24 72.99,55.3 63.97,55.3 K7.O1 K6.O1 | 86.32,74.67 86.7,75.05 J13.1 86.7,74.92 87.21,74.42 | 86.7,70.1 87.21,70.61 87.21,71.37 | 86.7,71.24 86.7,74.29 86.45,74.54 86.19,74.8
  Bottom 0.508: v83.53,61.59 83.53,61.06 83.42,60.96 | v83.53,61.59 82.77,61.59 82,62.35 | v83.53,61.59 v83.53,62.35 v82.77,62.35 | 82,62.35 82,62.41 v82,63.11 v82.77,62.35 | 82,62.35 v82.77,63.11 | 81.9,62.46 81.9,62.88 | v82,63.88 v82,64.64 82,66.16 | 82.13,66.67 83.02,66.67 | 81.62,67.69 v81.62,66.92 82.77,65.78 v82.77,63.88 84.29,65.4 v84.29,65.78 83.91,66.16 v83.91,66.67 v84.8,66.67 | v82.77,62.35 82,62.35 | 82,61.59 v83.53,61.59 | v83.53,61.59 v82.77,62.35
  Bottom 0.762: U$7.P$4 93.94,56 84.67,56 83.42,57.25 B100.AC2 | 81.75,67.94 81.75,66.92 82.13,66.54 82,66.42 v82,64.64 | 82.19,62.59 82,62.41 81.95,62.46 81.9,62.46 | v83.91,66.67 83.91,67.56 84.16,67.81 | v82.13,61.72 v82.77,62.35 | v84.29,65.78 84.8,66.29 v84.8,66.67
  Bottom 1.016: 86.45,74.54 86.32,74.67 85.43,73.78 | J13.1 86.7,70.1 84.42,67.81 | 83.66,67.05 84.42,67.81 | 82.19,62.59 81.9,62.88 | 82.02,62.59 80.48,64.13 83.02,66.67 84.16,67.81 84.42,67.81 | 87.21,71.37 87.21,74.42
  Bottom 1.524: v82.77,62.35 81.62,63.49 v81.62,66.92
  Bottom 2.032: 71.08,55.24 71.02,55.18 K8.O1 73.05,55.24 43.51,55.24 K5.O1 K4.O1 K3.O1 K2.O1 K1.O1 | U$15.P$2 81.67,66.92 v81.62,66.92
  Bottom 2.54: 86.19,74.8 86.19,72.89 | 86.7,70.86 86.7,71.24 | B100.AC2 83.42,60.96 81.9,62.88
  Bottom 3.048: 82.13,66.29 71.08,55.24 3.96,55.24 K1.O1
  Bottom 3.556: 86.7,70.86 82.13,66.29 82,66.16 71.15,55.3 63.97,55.3 K1.O1
N$1
  Bottom 0.508: JP101.2 87.06,42.44 87.65,41.84 C100.1
N$3
  Top 0.152: 74LVC2.5 24.86,14.46 23.52,15.8 R3.1
N$4
  Top 0.152: 74LVC2.4 25.8,15.86 R4.1
N$5
  Top 0.152: D1.2 49.72,31.58 D2.4
N$6
  Top 0.152: D2.2 57.17,31.58 D3.4
N$7
  Top 0.152: D3.2 64.62,31.58 D4.4
N$8  (via drill 0.35)
  Top 0.254: 81.75,72.89 82,73.15 82,75.97 82.13,76.1 ACOK!.A
  Top 0.508: v77.81,53.97 77.81,67.18 81.75,71.11 81.75,72.89
  Bottom 0.508: R110.1 77.81,54.03 v77.81,53.97
N$9
  Top 0.203: R1.2 83.72,6.34 86.45,6.34 86.86,5.93 3V3.C
  Top 0.254: 3V3.C 86.58,5.33
N$10  (via drill 0.35)
  Top 0.203: 5V.C v91.69,6.47 | v86.7,8.88 86.7,7.55 R2.2
  Bottom 0.203: v91.69,6.47 89.12,6.47 v86.7,8.88
N$13  (via drill 0.35)
  Top 0.406: P4.A 36.1,39.56 v36.03,39.49
  Bottom 0.406: v36.03,39.49 36.03,40.88 R103.1
N$14  (via drill 0.35)
  Top 0.406: v26.25,39.49 26.21,39.53 P3.A
  Bottom 0.406: R102.1 26.21,39.53 v26.25,39.49
N$16  (via drill 0.35)
  Top 0.406: P2.A 16.33,39.51 v16.34,39.49
  Bottom 0.406: R101.1 16.33,39.51 v16.34,39.49
N$17  (via drill 0.35)
  Top 0.152: P1.A v6.44,39.62
  Bottom 0.152: v6.44,39.62 R100.1
N$18  (via drill 0.35)
  Top 0.406: P8.A v75.65,39.36 | v75.65,39.36
  Bottom 0.406: R107.1 v75.65,39.36 | v75.65,39.36
N$19  (via drill 0.35)
  Top 0.406: v65.75,39.49 65.75,40.84 P7.A
  Bottom 0.406: R106.1 65.77,39.51 v65.75,39.49
N$20  (via drill 0.35)
  Top 0.406: P6.A 55.88,39.53 v55.84,39.49
  Bottom 0.406: v55.84,39.49 55.84,40.92 R105.1
N$21  (via drill 0.35)
  Top 0.406: P5.A 45.99,39.44 v46.06,39.36
  Bottom 0.406: R104.1 45.99,39.44 v46.06,39.36
NEUTRAL  (via drill 0.35, 0.8)
  Top 0.254: 91.4,66.16 U$18.P$1 90.77,66.8
  Top 0.762: 91.53,64.26 v90.51,65.27 | 91.66,64.26 v91.02,63.62 | U$18.P$1 92.8,64.26 v92.42,64.64 | 91.66,64.26 91.53,64.26 | 91.53,64.26 91.02,64.26 v90.77,64.51 | 91.4,66.16 91.02,66.54 | U$18.P$1 92.42,65.15 v92.42,67.05 | U$18.P$1 91.91,64.26 v91.53,64.64 | U$18.P$1 91.66,64.26 | v88.61,54.1 88.61,59.27 B100.AC1
  Top 1.27: 91.4,66.16 90.77,66.8 v90.51,67.05
  Bottom 0.254: U$17.P$1 91.15,66.56 91.15,66.67
  Bottom 0.508: 89.03,62.59 89.9,62.59
  Bottom 0.762: B100.AC1 88.27,59.61 | B100.AC1 89.28,59.36 90.51,60.59 90.51,61.97 | B100.AC1 89.88,60.71 89.88,62.61 90,62.61 v91.02,63.62 | U$7.P$3 89.12,53.59 v88.61,54.1 | v91.91,64 91.91,64.13 v92.42,64.64
  Bottom 1.016: 89.03,62.59 89.03,59.87 B100.AC1
  Bottom 1.524: v92.42,67.05 92.42,65.02 v91.02,63.62
  Bottom 2.032: J5.1 9.99,77.97 10.76,78.73 19.52,78.73 | 28.41,78.73 19.52,78.73 | 38.57,78.73 28.41,78.73 | 47.46,78.73 38.57,78.73 | 47.46,78.73 57.62,78.73 | 57.62,78.73 67.78,78.73 | 67.78,78.73 76.42,78.73 | 76.42,78.73 89.25,78.73 | J12.1 76.42,78.73 | 76.42,78.73 | J11.1 66.93,77.88 67.78,78.73 | J10.1 57.44,78.55 57.62,78.73 | J9.1 47.95,78.24 47.46,78.73 | J8.1 38.46,78.62 38.57,78.73 | J7.1 28.97,78.17 28.41,78.73 | J6.1 19.48,78.69 19.52,78.73 | U$17.P$2 92.69,65.02 92.42,65.02
  Bottom 2.54: 10.5,78.22 89.25,78.22 | 89.9,62.59 91.15,63.84 91.15,66.67 91.15,74.42 90.39,75.18 J13.2
  Bottom 3.048: J5.1 9.99,77.71 10.5,78.22 | J13.2 90.46,75.43 90.46,77.01 89.25,78.22
  other vias: 88.52,59.36
POTI-DMXRX  (via drill 0.35)  (1 unrouted)
  Top 0.254: R13.2 72.99,36.57 71.72,37.84 71.34,37.84 v70.95,37.46
  Top 0.305: v13.17,31.11 13.17,32.13 v15.07,34.03 | v18.12,35.55 18.12,36.82 v18.88,37.59 | v28.41,38.73 29.55,38.73 29.68,38.86 30.06,38.86 v30.7,39.49 | v84.8,39.75 89.62,39.75 94.37,35 95.59,35 99.02,31.57 99.02,11.81 97.88,10.66 J2.2
  Bottom 0.254: v70.95,37.46 70.95,36.82
  Bottom 0.305: U$1.SVN 6.69,27.05 6.69,30.6 7.2,31.11 v13.17,31.11 | v15.07,34.03 16.6,34.03 v18.12,35.55 | v18.88,37.59 27.27,37.59 v28.41,38.73 | v30.7,39.49 35.14,39.49 35.77,38.86 42.63,38.86 44.67,36.82 70.95,36.82 79.21,36.82 82.13,39.75 v84.8,39.75
RGB3V3  (via drill 0.35)
  Top 0.152: 74LVC2.3 30.8,10.64 32.3,12.14 34.48,12.14 34.7,12.36 35.69,12.36 36.54,13.2 36.54,16.89 37.3,17.65 39.59,17.65 v40.35,18.41 | U$1.IO32 37.93,21.71 40.6,21.71 41.11,21.2 v41.11,19.68
  Bottom 0.152: v40.35,18.41 40.35,18.92 v41.11,19.68
RGB5V  (via drill 0.35)
  Top 0.254: D1.4 33.54,31.03 32.09,29.59 26,29.59 25.36,30.22 18.76,30.22 17.36,31.62 v17.36,31.74 | J1.2 6.44,10.92 8.22,12.69 15.84,12.69 21.04,17.9 26.63,17.9 28.03,16.5 28.03,16.19 R4.2
  Bottom 0.254: v17.36,31.74 6.18,31.74 4.28,29.84 4.28,18.03 1.61,15.36 1.49,15.36 1.23,15.11 1.23,11.81 2.12,10.92 J1.2
SCL  (via drill 0.35)
  Top 0.152: v41.74,15.49 41.74,22.6 39.33,25.01 v39.08,25.01
  Top 0.254: CONN1.4 5.65,27.07 6.03,26.69 6.03,22.75 6.69,22.09 v6.69,21.84
  Bottom 0.152: U$2.3 60.67,8.5 60.67,14.47 59.65,15.49 v41.74,15.49 | v39.08,25.01 38.66,24.59
  Bottom 0.254: v6.69,21.84 6.82,21.71 8.22,21.71 8.63,21.3 8.63,21 9.28,20.35 35.6,20.35 36.46,21.2 36.54,21.2 36.57,21.23 36.57,21.92 37.22,22.57 37.4,22.57 37.71,22.89 38.14,22.89 38.79,23.54 38.79,24.46 38.66,24.59 38.14,25.11 37.22,25.11 37.12,25.01 36.16,25.01 U$1.IO22
SDA  (via drill 0.35)
  Top 0.152: v41.74,14.47 41.19,15.03 41.19,15.72 41.24,15.77 41.24,18.41 39.33,20.31 36.28,20.31 U$1.IO21
  Top 0.254: v6.69,23.11 6.69,27.17 5.8,28.07 CONN1.3
  Bottom 0.152: U$2.4 53.43,3.8 55.33,3.8 60.29,8.76 60.29,14.35 59.52,15.11 42.38,15.11 v41.74,14.47
  Bottom 0.254: v6.69,23.11 9.06,23.11 9.28,22.89 25.87,22.89 27.11,22.89 28.92,21.08 34.76,21.08 U$1.IO21
SSR1
  Top 0.152: 4.03,42.6 K1.- | 6.09,42.6 6.29,42.81 P1.C
  Top 0.406: IC1.18 9.04,42.81 6.29,42.81 | P1.C 6.09,42.6 4.03,42.6
SSR1-3V3  (via drill 0.35)
  Top 0.254: IC1.1 15.66,23.03 14.57,24.12 12.41,24.12 U$1.IO26
  Top 0.305: v19.01,24.63 IC1.1
  Bottom 0.305: RN100.8 17.77,25.88 v19.01,24.63
SSR2
  Top 0.406: IC1.17 20.28,37.33 18,39.62 18,42.54 17.58,42.95 P2.C 15.97,42.6 K2.-
SSR2-3V3  (via drill 0.35)
  Top 0.254: IC1.2 20.28,21.71 19.52,20.95 12.79,20.95 U$1.IO18
  Top 0.305: IC1.2 v20.28,24.63
  Bottom 0.305: v20.28,24.63 18.14,26.77 RN100.7
SSR3
  Top 0.406: P3.C 25.86,42.6 K3.- 23.67,36.92 21.55,34.79 IC1.16
SSR3-3V3  (via drill 0.35)
  Top 0.254: IC1.3 21.53,23.01 21.53,20.86 19.59,18.92 U$1.IO19
  Top 0.305: IC1.3 v21.55,24.63
  Bottom 0.305: v21.55,24.63 18.61,27.57 RN100.6
SSR4
  Top 0.305: K4.- 33.91,42.95 P4.C
  Top 0.406: K4.- 33.56,38.8 33.11,38.35 29.89,38.35 29.18,37.64 27.13,37.64 24.16,34.67 23.2,34.67 22.82,34.28 IC1.15
SSR4-3V3  (via drill 0.35)
  Top 0.254: IC1.4 22.82,19.93 21.2,18.31 20.88,18.31 18.94,16.38 U$1.IO23
  Top 0.305: v22.69,24.63 22.82,24.51 IC1.4
  Bottom 0.305: RN100.5 19.11,28.47 22.82,24.76 v22.69,24.63
SSR5
  Top 0.406: IC1.14 24.09,33.8 27.21,36.93 27.24,36.93 27.39,37.08 29.41,37.08 30.12,37.79 42.58,37.79 43.52,38.73 43.52,42.53 K5.- 45.64,42.6 P5.C
SSR5-3V3  (via drill 0.35)
  Top 0.254: IC1.5 24.09,20.19 25.36,18.92 U$1.IO17
  Top 0.305: IC1.5 v24.09,24.63
  Bottom 0.305: v24.09,24.63 27.93,28.47 RN101.8
SSR6
  Top 0.406: K6.- 53.81,42.6 | 53.81,42.6 55.53,42.6 P6.C | 53.81,42.6 53.43,42.22 53.43,37.97 52.69,37.23 30.35,37.23 29.49,36.37 27.44,36.37 25.36,34.28 IC1.13
SSR6-3V3  (via drill 0.35)
  Top 0.254: IC1.6 25.36,20.7 26.25,19.81 34.46,19.81 34.68,20.03 35.6,20.03 36.2,19.43 36.28,19.43 36.28,17.52 U$1.IO16
  Top 0.305: IC1.6 v25.36,24.63
  Bottom 0.305: v25.36,24.63 28.3,27.57 RN101.7
SSR7
  Top 0.406: IC1.12 26.63,34.28 28.16,35.81 29.72,35.81 30.58,36.67 61.78,36.67 63.23,38.11 K7.- 63.58,42.95 P7.C
SSR7-3V3  (via drill 0.35)
  Top 0.254: IC1.7 26.63,21.2 27.27,20.57 31.84,20.57 34,22.73 35.78,22.73 36.41,23.36 36.41,25.27 U$1.IO27
  Top 0.305: IC1.7 v26.63,24.63
  Bottom 0.305: v26.63,24.63 28.77,26.77 RN101.6
SSR8
  Top 0.406: P8.C 75.17,42.48 K8.- 72.92,42.48 66.56,36.11 30.81,36.11 29.87,35.17 28.41,35.17 28.03,34.79 28.03,32.96 IC1.11
SSR8-3V3  (via drill 0.35)
  Top 0.254: IC1.8 27.9,21.33 28.03,21.2 30.82,21.2 v31.71,22.09
  Top 0.305: IC1.8 v27.9,24.63
  Bottom 0.254: v31.71,22.09 32.35,22.73 36.41,22.73 U$1.IO25
  Bottom 0.305: v27.9,24.63 29.15,25.88 RN101.5
SSROUT-1
  Bottom 2.032: K1.O2 7.45,62.92 13.49,68.96 J5.2
SSROUT-2
  Bottom 2.032: K2.O2 16.27,62.92 22.98,69.63 J6.2
SSROUT-3
  Bottom 2.032: K3.O2 25.09,62.92 32.47,70.31 J7.2
SSROUT-4
  Bottom 2.032: K4.O2 34.03,62.92 41.96,70.85 J8.2
SSROUT-5
  Bottom 2.032: K5.O2 43.45,63.39 51.45,71.39 J9.2
SSROUT-6
  Bottom 2.032: K6.O2 53.34,64.09 60.94,71.69 J10.2
SSROUT-7
  Bottom 2.032: K7.O2 63.23,65.54 70.43,72.74 J11.2
SSROUT-8
  Bottom 2.032: K8.O2 73.11,66.22 79.92,73.03 J12.2
TEMP  (via drill 0.35)
  Top 0.152: JP1.2 41.62,25.78 43.57,23.82 47.05,23.82 47.36,24.12 v47.71,24.12 | v48.18,21.2 48.18,20.67 46.27,18.77 46.27,18.49 46.11,18.33 46.09,18.33 45.76,18 45.76,15.05 46.24,14.58 46.24,14.12 45.94,13.81 45.94,12.82 45.55,12.44 v45.17,12.44
  Bottom 0.152: v45.17,12.44 44.03,11.3 U$1.IO2 | v47.71,24.12 48.18,23.66 v48.18,21.2
TEMP-JP  (via drill 0.35)
  Top 0.152: U1.2 39.77,31.81 43.16,31.81 43.39,31.58 43.39,29.71 43.46,29.65 | 43.46,29.65 48.73,24.38 v48.73,24.12 | v48.98,21.08 48.98,18.09 R5.1 | JP1.1 42.13,28.32 43.46,29.65
  Bottom 0.152: v48.73,24.12 48.98,23.87 v48.98,21.08
VSSR  (via drill 0.35)
  Top 0.406: 13.79,46.24 13.68,46.35 | 23.67,46.31 23.71,46.35 | 33.49,45.22 33.49,46.35 | 53.34,45.88 53.81,46.35 | 63.23,46.33 63.21,46.35
  Top 0.508: 76.47,44.09 77.16,44.09 77.92,44.85 78.22,44.85 78.83,45.46 v79.21,45.46 | 28.41,46.35 28.41,41.78 29.43,40.76 v29.43,40.38 | v29.17,31.24 IC1.10 31.34,32.84
  Top 0.762: 76.47,44.09 74.04,44.09 K8.+ 71.78,46.35 63.97,46.35 | 63.97,46.35 63.21,46.35 58.38,46.35 | 53.81,46.35 58.38,46.35 | 53.81,46.35 43.65,46.35 | 33.49,46.35 43.65,46.35 | 33.49,46.35 28.41,46.35 23.71,46.35 13.68,46.35 | 13.68,46.35 4.53,46.35 3.9,45.71 K1.+ | 63.97,46.35 63.23,45.61 K7.+ | 53.81,46.35 53.81,45.61 K6.+ | 43.65,46.35 43.65,45.34 K5.+ | 33.49,46.35 33.56,46.28 K4.+ | K3.+ 23.67,46.31 | 13.68,46.35 13.68,45.25 K2.+ | C10.2 58.38,46.35
  Top 1.27: 31.34,32.84 C6.1
  Bottom 0.508: v79.21,45.46 JP100.2 | v29.43,40.38 29.43,31.49 v29.17,31.24
ZEROSIGNAL  (via drill 0.35)
  Top 0.152: U$1.IO33 9.87,18.92 11.14,17.65 v15.84,17.65 | v42.38,19.68 46.06,23.36 57.24,23.36 v60.79,26.92
  Top 0.254: v88.23,37.08 88.23,34.16 v88.99,33.4
  Bottom 0.152: v15.84,17.65 34.34,17.65 34.53,17.45 39.26,17.45 39.46,17.65 40.47,17.65 42.38,19.55 v42.38,19.68 | v60.79,26.92 65.77,26.92 67.12,28.26 67.22,28.26 70.7,31.74 71.64,31.74 73.52,33.62 74.54,33.62 76.54,31.62 86.83,31.62 87.85,32.63 | U2.4 96.5,44.31 96.8,44.62 97.11,44.62 97.33,44.84 97.33,45.44 97.11,45.66 93,45.66 92.29,44.95 92.29,43.93 92.77,43.45 92.77,40.32 92.29,39.84 92.29,39.55 R14.1 90.05,37.31 90.05,37.23 89.73,36.9 89.27,36.9 89.09,37.08 v88.23,37.08
  Bottom 0.254: v88.99,33.4 88.23,32.63 87.85,32.63
ZEROSIGNALRAW
  Bottom 0.152: U2.2 98.58,44.62 98.39,44.62 98.17,44.84 98.17,45.03 97.24,45.97 92.8,45.97 91.86,45.03 91.86,43.81 | 91.86,43.81 91.86,43.76 | OK100.4 91.66,41.4 | 91.66,41.4 91.66,42.22 OK101.4 92.29,43.38 91.86,43.81 | 91.66,41.4 90.66,41.4 90.11,40.84 86.47,40.84 JP101.1
  Bottom 0.508: JP101.1 85.2,41.14 83.97,41.14 R109.1
(copper drawn outside any net)
  shapes: Top area x2

## Text on the board
tPlace: AC / ON! | N | L | N | L | N | L | N | L | N | L | N | L | N | L | N | L | L | N | LINE | P1 | P2 | P3 | P4 | P5 | P6 | P7 | P8 | NEUTRAL | Line | HIGH VOLTAGE / DANGER! | HIGH VOLTAGE / DANGER! | Neutral | IO26 | IO18 | IO19 | IO23 | IO17 | IO16 | IO27 | IO25 | VIN | SIGNAL | ^8SSR Channel with ZeroCrossing^ | GND | GND | <Current Sense Coil | 3V3 | QWIIC | 5V | GND | 12V | DS18B20 | GND | 3V3 | SDA | SCL | ULN2803 | BUTTON | 5V | GND | GND | 3V3 | RGB | AN | 5V | GND | 8Channel / AC Dimmer
bPlace: L | L | L | L | L | L | L | L | L | N | SSR1 | SSR2 | SSR3 | SSR4 | SSR5 | N | SSR6 | N | SSR7 | N | N | N | N | N | N | <INPUT | SSR8 | MAINS | NEUTRAL> | LINE> | USE AT YOUR OWN RISK | LIVE | NEUTRAL | HIGH VOLTAGE! DANGER! / KEEP TO THE MAXIMUM RATINGS | 12V / VIN | <12V | <5V | D | GND | TEMP | Jumper1:NCZero / C:Power Watching | GND | INFRARED | GND | 3V3 | Analog:IO39 / InfraRed:IO35 / ZeroCrossing:IO33 / CurrentSignal:IO34 / RGB:IO32 / BTN:IO15 / SCL:IO22 / SDA:IO25 / EncoderA:IO13 / EncoderB:IO36 / EncoderS:IO4 | 3V3 | PINOUT | 5V | GND | VIN / 12V | GND | RST | GND | IO27 | 26 | 22 | IO25 | ENCODER | 35 | 18 | 21 | IO32 | A | B | GND | 33 | 19 | 17 | TDI | 5V | 34 | 23 | IO16 | IO4 | SSR1:IO26 / SSR2:IO18 / SSR3:IO19 / SSR4:IO23 / SSR5:IO17 / SSR6:IO16 / SSR7:IO27 / SSR8:IO25 | GND | GND | 05 | IO0 | 3V3 | D | 3V3 | 5V | IO2 | v5|2023 | RGB-OUT | ANALOGIN | AN | 5V | TCK | TD0 | SD1 | ONONO.lu | GND | Switch | GND | SD3 | SD0 | CLK | SDA | SCL | 3V3 | GND | 8Channel SSR | HAPPY DIMMING